# Altium PCB ActiveElectrod.PcbDoc
Units mm, origin at the board's own origin, x right, y up, seen from the top; angles counter-clockwise.
Board outline 24 x 11.5 mm, 2 copper layers (Top Layer, Bottom Layer); 19 components, 8 nets, 39 pads, 0 vias.
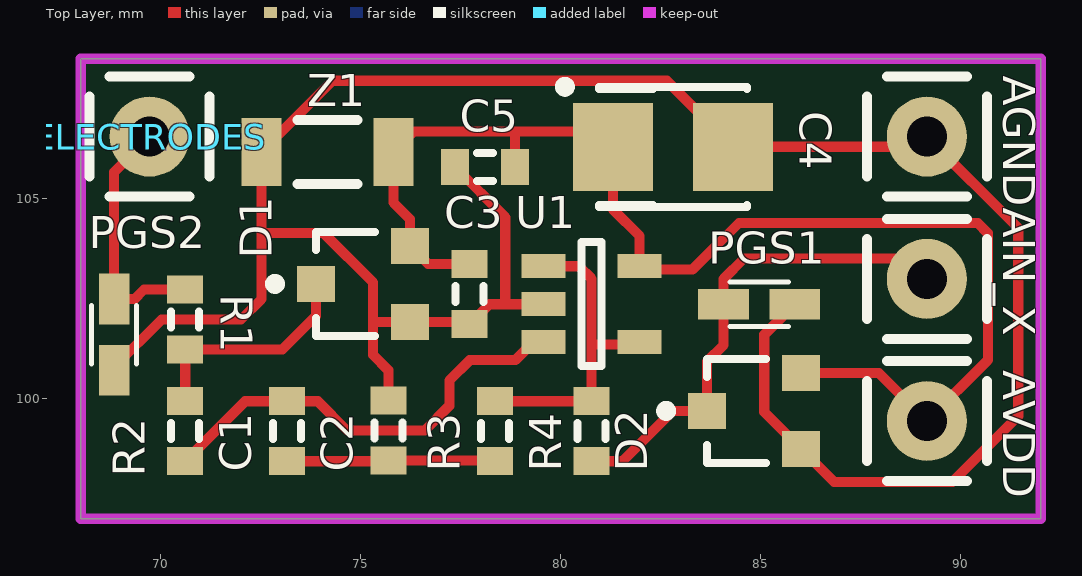
[diagram p0: Top Layer view]
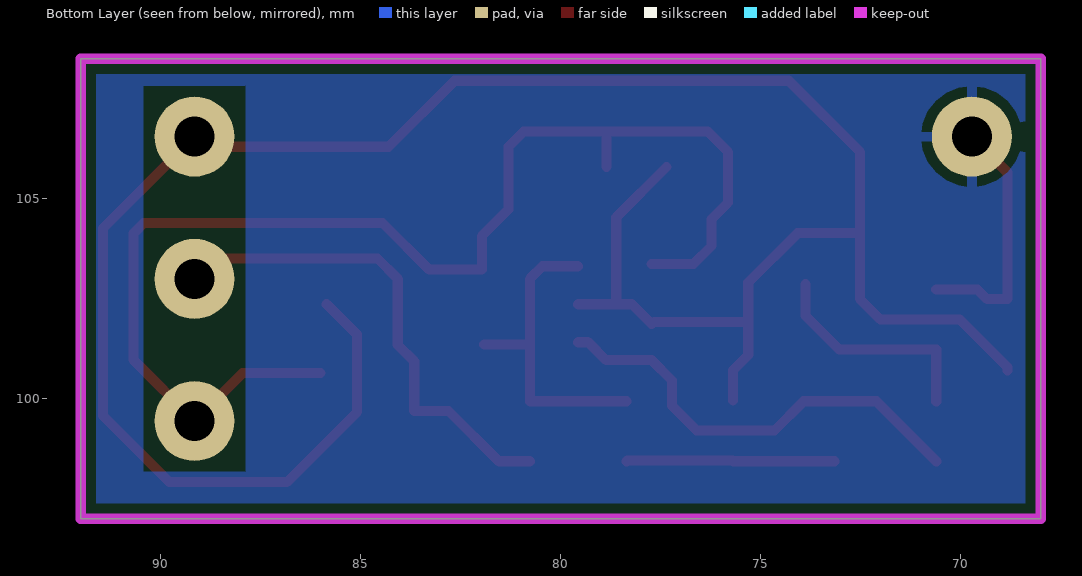
[diagram p1: Bottom Layer view, seen from below]

## Layer stack, top to bottom
Top Solder: solder mask 0.0102, Solder Resist, Dk 3.5
Top Layer: signal copper 0.0356
Dielectric 1: dielectric 0.32, FR-4, Dk 4.8
Bottom Layer: signal copper 0.0356
Bottom Solder: solder mask 0.0102, Solder Resist, Dk 3.5

## Board outline
68,97 68,108.5 92,108.5 92,97

## Design rules (kind name [scope] priority, off if disabled: settings)
Clearance [All] p1: gap=0.254
PolygonConnect [All] p1: connectstyle=Relief reliefconductorwidth=0.254 reliefentries=4 polygonreliefangle="90 Angle" airgapwidth=0.254
RoutingVias [All] p1: holewidth=0.711 width=1.27 viastyle="Through Hole" minholewidth=0.711 minwidth=1.27 maxholewidth=0.711 maxwidth=1.27
SolderMaskExpansion [All] p1: expansion=0.102
Width [All] p1: maxlimit=0.254 minlimit=0.254 preferedwidth=0.254
30 further rules are at their usual default settings.

## Classes and differential pairs
component class ActiveElectrod: C1 C2 C3 C4 C5 D1 D2 PGS1 PGS2 R1 R2 R3 R4 U1 Z1

## Components (designator, comment, footprint, x,y, rotation, side; value= is the part's Value field where it differs from the comment)
AGND "Test Point 1" "Test Point" 89.154,106.553 r90 top
AIN_X "" "Test Point" 89.154,102.997 r90 top
AVDD "Test Point 1" "Test Point" 89.154,99.441 r90 top
C1 "Cap Semi" J1-0603 73.152,99.187 r270 top
C2 "Cap Semi" J1-0603 75.692,99.206 r270 top
C3 "Cap Semi" J1-0603 77.724,102.616 r90 top
C4 "Cap polar_Vishay Type B" "3528 - Type B" 82.804,106.299 r0 top
C5 "Cap Semi" J1-0603 78.105,105.791 r180 top
D1 "BAV99" SOT-23 75.057,102.87 r90 top
D2 "BAV99" SOT-23 84.836,99.695 r90 top
ELECTRODES "" "Test Point" 69.723,106.553 r90 top
PGS1 "PGB1010603MR" *ESD_PGB1010603MR 84.963,102.362 r180 top
PGS2 "PGB1010603MR" *ESD_PGB1010603MR 68.834,101.6 r90 top
R1 "Res1" J1-0603 70.612,101.981 r90 top
R2 "Res1" J1-0603 70.612,99.187 r90 top
R3 "Res1" J1-0603 78.359,99.187 r270 top
R4 "Res1" J1-0603 80.772,99.187 r90 top
U1 "OPA336NA/3K" TI-DBV5_N 80.772,102.362 r0 top
Z1 "BZV55-C10,115" BZV55-C10 74.168,106.172 r180 top

## Footprints (in the part's own frame and the unit in brackets; to place one, negate y for a bottom-side part, rotate by r counter-clockwise, add the part's x,y. Pads: shape width x height; smd on the part's side, far side on the other; paste and mask are expansions set on the pad)
"3528 - Type B" [mm] "Capacitor, SM Tantalum; Body 3.5 x 2.8 mm (LxW typ)"
  rect 2x2.2 smd: 1(-1.5,0) 2(1.5,0)
  silkscreen extent -2.82,-1.5 1.85,1.62, body extent -1.85,-1.46 1.85,1.47, height 2.03
*ESD_PGB1010603MR [mm]
  rect 1.27x0.76 smd: 1(-0.89,0) 2(0.89,0)
  silkscreen extent -0.73,-0.56 0.73,0.56
BZV55-C10 [mm]
  rect 1x1.7 smd: 1(-1.65,0) 2(1.65,0)
  silkscreen extent -0.75,-0.8 0.75,0.8
J1-0603 [mm] "Chip Resistor, Body 1.6x0.8mm, IPC High Density"
  rect 0.7x0.9 smd: 1(-0.75,0) 2(0.75,0)
  silkscreen extent -0.2,-0.35 0.2,0.35, body extent -0.85,-0.48 0.85,0.48, height 0.9
SOT-23 [mm] "SOT-23; 3 Leads; Body 3.0 x 2.5 mm, inc. leads (LxW max), Alternate Lead Configuration"
  rect 0.9x0.95 smd: 1(-0.95,-1.175) 2(0.95,-1.175) 3(0,1.175)
  silkscreen extent -1.3,-0.3 1.3,2.32, body extent -1.5,-1.25 1.5,1.25, height 1.09
"Test Point" [mm] "Тестовая точка. Подключаемся и мерием сигнал."
  round 2 hole 1: 1(0,0)
  silkscreen extent -1.5,-1.5 1.5,1.5, body extent -1.25,-1.25 1.29,1.29, height 5.94
TI-DBV5_N [mm] "SOT23, 5-Leads, Body 2.9x1.6mm, Pitch 0.95mm, IPC Medium Density"
  rect 1.1x0.6 smd: 1(-1.2,0.95) 2(-1.2,0) 3(-1.2,-0.95) 4(1.2,-0.95) 5(1.2,0.95)
  silkscreen extent -0.25,-1.55 0.25,1.55, body extent -0.87,-1.52 0.87,1.53, height 1.45

## Part data
AGND AVDD: "Header, 1-Pin"
AIN_X ELECTRODES: library part "Test Point 1", "Header, 1-Pin"
C1 C2 C3 C5: "Capacitor (Semiconductor SIM Model)"
C4: "Capacitor (Model Sergeev)"
D1 D2: "Диодная сборка, 2 диода, катод/анод, 100 V, 125/215 mA, Iобр.=0.5 uA, 4 ns"
PGS1 PGS2: "PGB1 Series 15 V 63 Bi-Directional Surface Mount PulseGuard® ESD Suppressor"
R1 R2 R3 R4: "Resistor"
U1: "Single-Supply, MicroPower CMOS Operational Amplifier MicroAmplifier(TM) Series, 2.3 to 5.5 V, -55 to 125 degC, 5-pin SOT23 (DBV5), Green (RoHS & no Sb/Br)"
Z1: "Diode"

## Nets (pads, with @x,y where several pads share a name; then routed paths per layer and width w, separated by ;. In a path a pad name is that pad's centre, name@x,y a point inside that pad or via, vN(x,y) a via of type N, cw(c..) or ccw(c..) an arc to the next point about the centre after c; other vN are vias at no path point)
AGND: AGND.1 C2.1 C3.1 C4.2 C5.2 D1.1 D2.1 PGS1.1 PGS2.1 U1.2 Z1.2 | length 59.8
  Top Layer w0.254: PGS2.1 68.834,100.792 70.023,101.981 72.009,101.981 72.518,102.49 72.518,104.14 ; C2.1 75.692,100.711 75.311,101.092 75.311,101.92 ; D1.1 75.311,101.92 ; D1.1@76.296,101.92 77.67,101.92 C3.1 78.22,102.362 78.613,102.362 ; C5.2 78.613,104.533 78.613,102.362 ; U1.2 78.613,102.362 ; PGS1.1 85.09,101.599 85.09,99.666 D2.1 86.839,97.917 89.789,97.917 91.44,99.568 91.44,104.267 AGND.1 88.9,106.299 C4.2 82.653,107.95 74.296,107.95 Z1.2 72.518,104.14 ; 72.518,104.14 74.076,104.14 75.311,102.905 75.311,101.92
AVDD: AVDD.1 C3.2 C4.1 C5.1 D1.2 D2.2 U1.5 Z1.1 | length 32.5
  Top Layer w0.254: C3.2 76.686,103.366 D1.2 76.232,104.489 75.818,104.903 Z1.1 76.326,106.68 80.923,106.68 C4.1 81.304,104.738 81.972,104.07 U1.5 81.972,103.228 83.289,103.228 84.455,104.394 90.424,104.394 90.678,104.14 90.678,100.965 AVDD.1 87.95,100.645 D2.2 ; C5.1 78.855,106.668
NetAIN_X_1: AIN_X.1 D2.3 PGS1.2 R4.1 | length 12.4
  Top Layer w0.254: R4.1 81.546,98.437 82.804,99.695 D2.3 83.661,100.933 84.073,101.345 PGS1.2 84.073,102.996 84.582,103.505 88.646,103.505 AIN_X.1
NetC1_1: C1.1 R2.1 U1.3 | length 11.2
  Top Layer w0.254: R2.1 72.112,99.937 C1.1 73.926,99.937 74.657,99.206 76.6,99.206 77.216,99.822 77.216,100.457 77.724,100.965 78.867,100.965 79.314,101.412 U1.3
NetC1_2: C1.2 C2.2 R3.2 | length 5.2
  Top Layer w0.254: C1.2 C2.2@75.692,98.437 ; C2.2 78.34,98.456 R3.2
NetD1_3: D1.3 R1.1 R2.2 | length 5.7
  Top Layer w0.254: R2.2 R1.1 73.037,101.231 73.882,102.076 D1.3
NetELECTRODES_1: ELECTRODES.1 PGS2.2 R1.2 | length 6.3
  Top Layer w0.254: ELECTRODES.1 68.834,105.664 PGS2.2 69.343,102.49 69.584,102.731 R1.2
NetR3_1: R3.1 R4.2 U1.1 U1.4 | length 7.9
  Top Layer w0.254: R3.1 R4.2 80.772,101.355 ; U1.1 80.457,103.312 80.772,102.997 80.772,101.355 ; U1.4@81.915,101.355 80.772,101.355

## Polygon pours and split planes (outlines as drawn)
NetELECTRODES_1 on Bottom Layer "GND" (solid, pour order 6): 68,108.458 92,108.458 92,97.155 68,97.155

## Keep-outs
Keep-Out Layer:
  the board outline again, w0.254

## Other copper
Bottom Layer:
  pour cut-out: 90.424,98.181 87.884,98.171 87.884,107.823 90.424,107.813